# Altium PCB EDR_New.PcbDoc
Units mm, origin at the board's own origin, x right, y up, seen from the top; angles counter-clockwise.
Board outline 66.29 x 44.2 mm, 2 copper layers (Top Layer, Bottom Layer); 27 components, 22 nets, 104 pads, 40 vias.
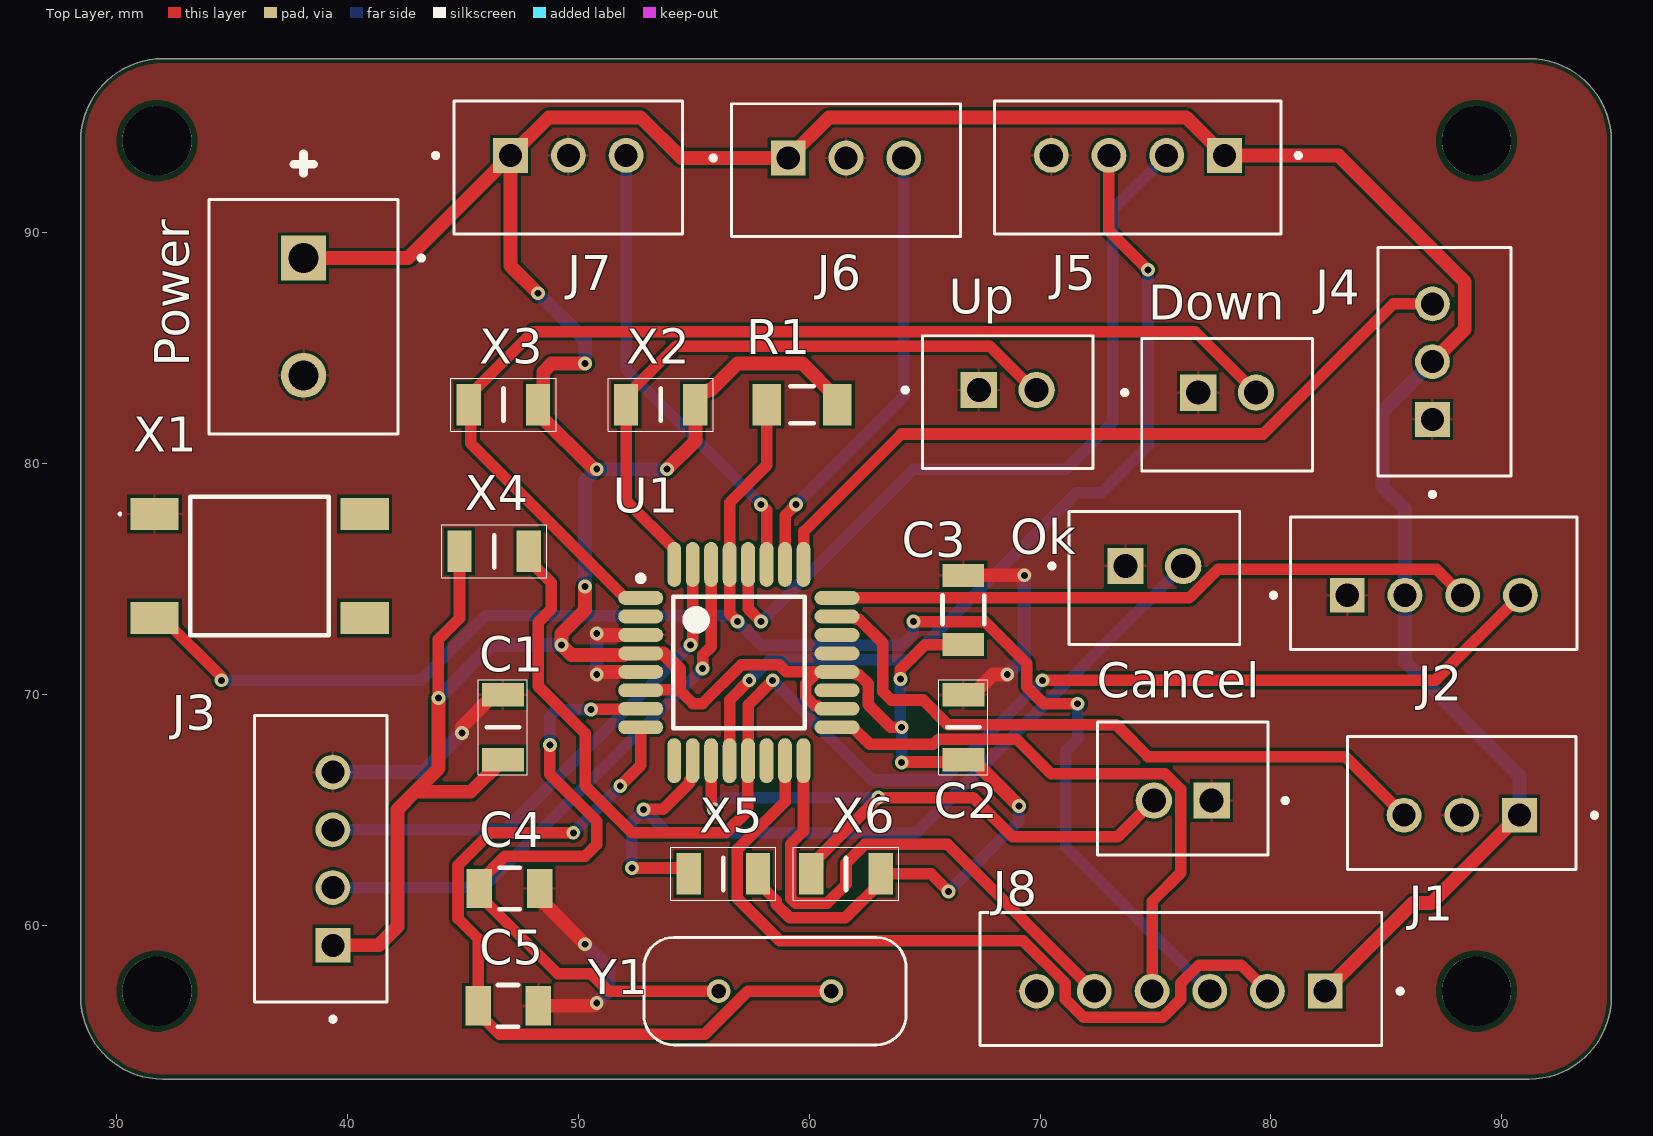
[diagram p0: Top Layer view]
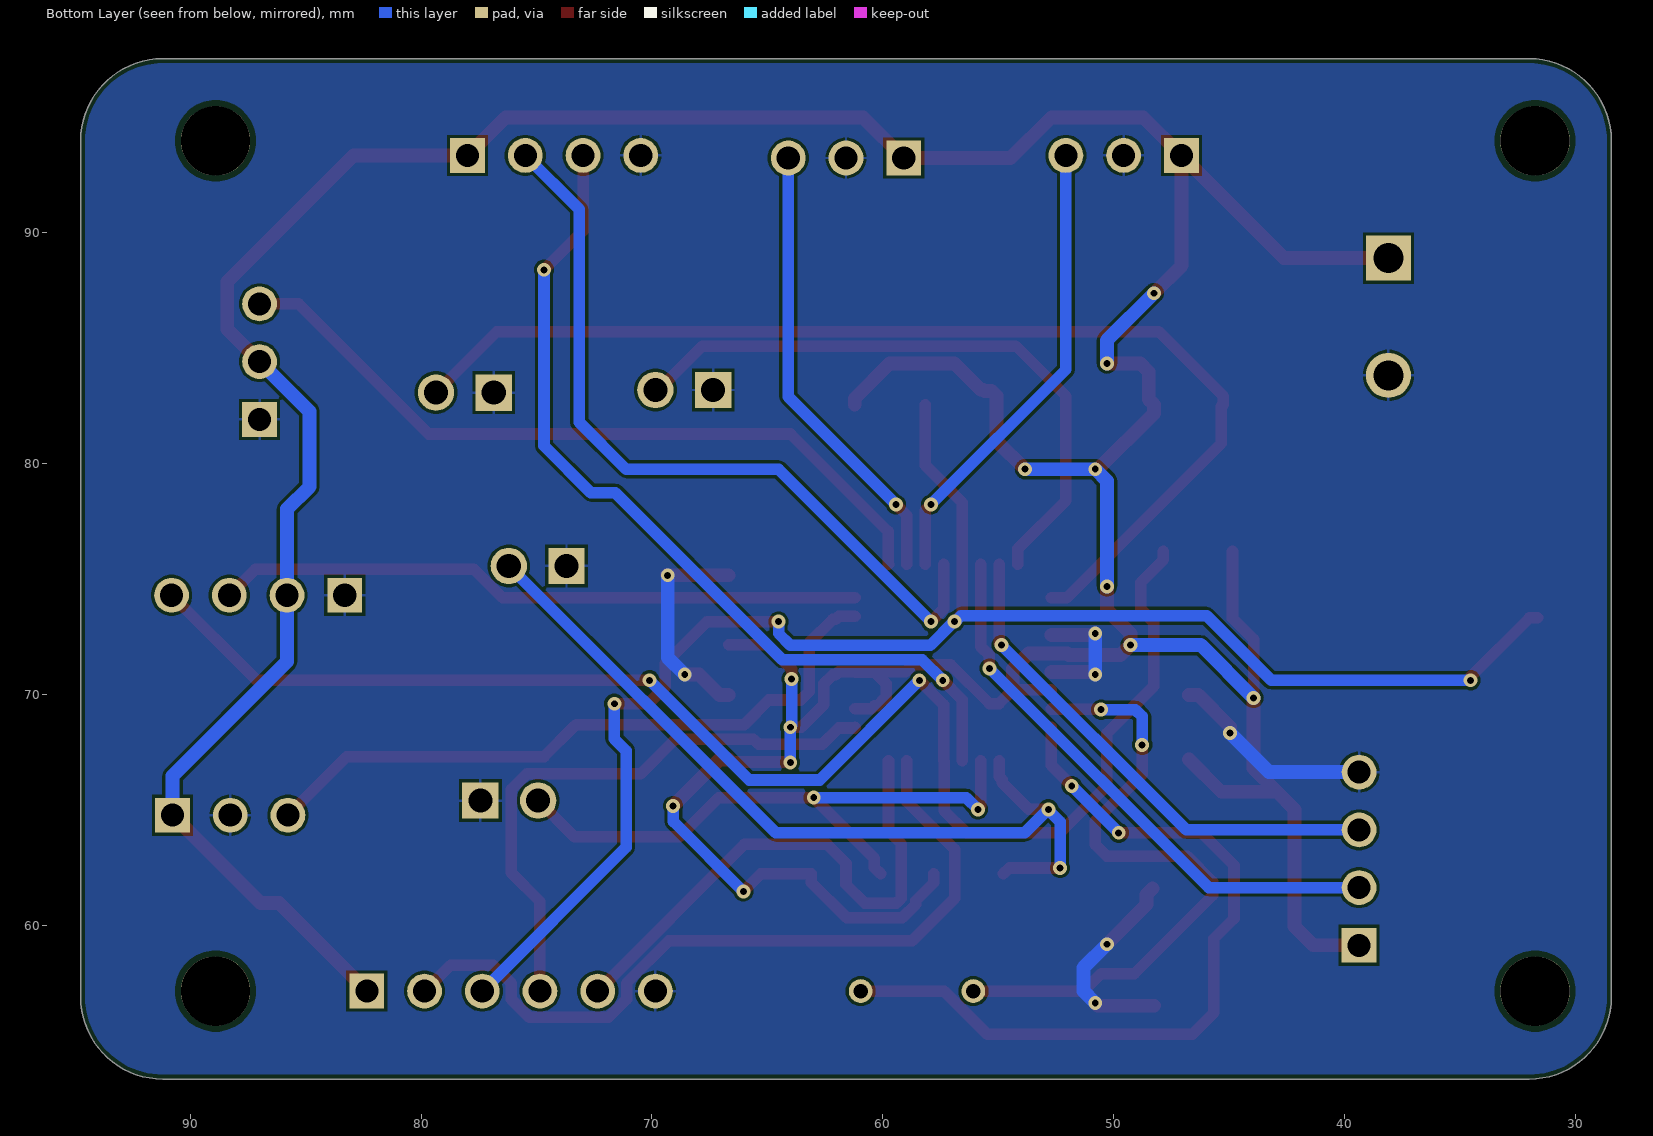
[diagram p1: Bottom Layer view, seen from below]
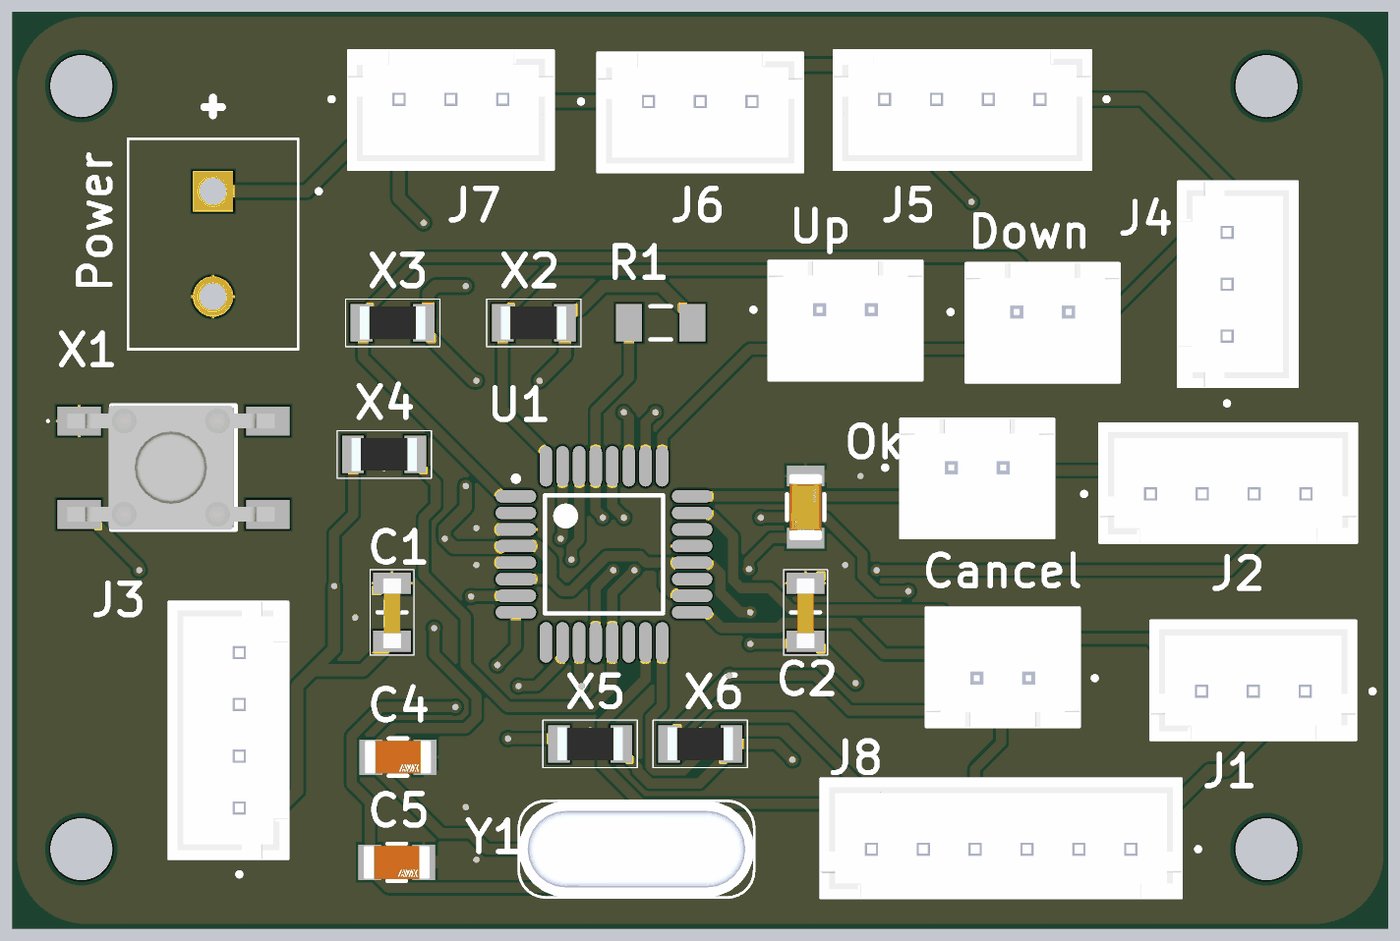
[diagram p2: 3D render of the assembled board from above, using the file's embedded part models]

## Layer stack, top to bottom
Top Solder: solder mask 0.0102, Solder Resist, Dk 3.5
Top Layer: signal copper 0.0356
Dielectric 1: dielectric 0.32, FR-4, Dk 4.8
Bottom Layer: signal copper 0.0356
Bottom Solder: solder mask 0.0102, Solder Resist, Dk 3.5

## Board outline
28.448,56.896 28.448,93.98 cw(c32.004,93.98) 32.004,97.536 91.186,97.536 cw(c91.186,93.98) 94.742,93.98 94.742,56.896 cw(c91.186,56.896) 91.186,53.34 32.004,53.34 cw(c32.004,56.896)

## Design rules (kind name [scope] priority, off if disabled: settings)
BoardOutlineClearance [All] p1: gap=0.2 ignorepadtopadclearanceinfootprint=FALSE
Clearance [All] p1: gap=0.127 ignorepadtopadclearanceinfootprint=FALSE except(0.25: Arc-Hole Track-Hole SMDPad-Hole THPad-Hole Via-Hole Fill-Hole Poly-Hole Region-Hole Text-Hole)
ComponentClearance [All] p1: gap=0.127 collisioncheckmode=3 verticalgap=0.127 showdistances=TRUE
DiffPairsRouting [All] p1: maxlimit=0.254 minlimit=0.127 mostfreqgap=0.127 toplayer_minwidth=0.127 toplayer_maxwidth=25.4 toplayer_prefwidth=0.127 bottomlayer_minwidth=0.127 bottomlayer_maxwidth=25.4 bottomlayer_prefwidth=0.127 maxuncoupledlength=12.7
Height [All] p1: minheight=0 maxheight=1816.048 prefheight=12.7
HoleSize [All] p1: absolutevalues=TRUE maxlimit=6.3 minlimit=0.3 maxpercent=80.000 minpercent=20.000
HoleToHoleClearance [All] p1: gap=0.25 allowstackedmicrovias=FALSE
MinimumAnnularRing [All] p1: minimumring=0.076
MinimumSolderMaskSliver [All] p1: minsoldermaskwidth=0
PlaneClearance [All] p1: clearance=0.127
PlaneConnect PlaneConnectPowerPads [InPadClass('PowerPads')] p1: planeconnectstyle=Direct reliefexpansion=0.508 reliefentries=4 reliefconductorwidth=0.254 reliefairgap=0.254
PlaneConnect [All] p2: pad.planeconnectstyle=Relief pad.reliefexpansion=0.3 pad.reliefentries=4 pad.reliefconductorwidth=0.127 pad.reliefairgap=0.127 via.planeconnectstyle=Direct via.reliefexpansion=0.3 via.reliefentries=4 via.reliefconductorwidth=0.127 via.reliefairgap=0.127
PolygonConnect PolygonConnectPowerPads [All vs (InPadClass('PowerPads'))] p1: connectstyle=Direct reliefconductorwidth=0.254 reliefentries=4 polygonreliefangle="90 Angle" airgapwidth=0.254
PolygonConnect [All] p2: thpad.connectstyle=Relief thpad.reliefconductorwidth=0.127 thpad.reliefentries=4 thpad.polygonreliefangle="90 Angle" thpad.airgapwidth=0.127 smdpad.connectstyle=Relief smdpad.reliefconductorwidth=0.127 smdpad.reliefentries=4 smdpad.polygonreliefangle="90 Angle" smdpad.airgapwidth=0.127 via.connectstyle=Direct via.reliefconductorwidth=0.127 via.reliefentries=4 via.polygonreliefangle="90 Angle" via.airgapwidth=0.127
RoutingVias [All] p1: holewidth=0.3 width=0.6 viastyle="Through Hole" minholewidth=0.3 minwidth=0.6 maxholewidth=0.6 maxwidth=6.6
SilkToSilkClearance [All] p1: silktosilkclearance=0
SilkToSolderMaskClearance [IsPad] p1: minsilkscreentomaskgap=0.127 clearancetoexposedcopper=TRUE
SolderMaskExpansion [All] p1: expansion=0.075 istentingtop=FALSE
Width [All] p1: maxlimit=25.4 minlimit=0.127 preferedwidth=0.127 minimp=50.000000 maximp=50.000000 favimp=50.000000
20 further rules are at their usual default settings.

## Classes and differential pairs
component class MCU: C1 C2 C3 C4 C5 J8 R1 U1 X1 Y1
component class Main0: Cancel Down J3 J4 J5 J6 Ok Power Up X2 X3 X4 X5 X6

## Components (designator, comment, footprint, x,y, rotation, side; value= is the part's Value field where it differs from the comment)
C1 "C1206C106K8RAC" CAPC3216X180N 46.736,68.58 r270 top
C2 "C1206C106K8RAC" CAPC3216X180N 66.675,68.58 r270 top
C3 "CC1206KRX7R9BB104" FP-CC1206-1_25-MFG 66.675,73.66 r90 top value="100 nF"
C4 "12065A220JAT2A" FP-1206-L_3_2_0_2-W_1_6_0-IPC_C 47.021,61.595 r0 top
C5 "12065A220JAT2A" FP-1206-L_3_2_0_2-W_1_6_0-IPC_C 46.959,56.515 r0 top
Cancel "B2B-XH-A(LF)(SN)" JST_B2B-XH-A(LF)(SN) 76.18,65.93 r0 top
Down "B2B-XH-A(LF)(SN)" JST_B2B-XH-A(LF)(SN) 78.105,82.55 r180 top
J1 "PH_Sensor" "JST_B3B-XH-A (LF)(SN)" 88.265,65.295 r0 top
J2 "Turbidity_Sensor" JST_B4B-XH-A(LF)(SN) 87.055,74.82 r0 top
J3 "Display" JST_B4B-XH-A(LF)(SN) 38.845,62.885 r90 top
J4 "Conductivity_Sensor" "JST_B3B-XH-A (LF)(SN)" 87.52,84.415 r270 top
J5 "Temperature_Sensor" JST_B4B-XH-A(LF)(SN) 74.235,92.82 r180 top
J6 "MQ9" "JST_B3B-XH-A (LF)(SN)" 61.595,92.71 r180 top
J7 "MQ135" "JST_B3B-XH-A (LF)(SN)" 49.57,92.82 r180 top
J8 "B6B-XH-A(LF)(SN)" JST_B6B-XH-A(LF)(SN) 76.1,57.675 r0 top
Ok "B2B-XH-A(LF)(SN)" JST_B2B-XH-A(LF)(SN) 74.95,75.04 r180 top
Power "TB006-508-02BE" terminalbox 38.1,88.9 r270 top
R1 "RC1206FR-0710KL" RESC3116X65X40ML10T20 59.69,82.55 r0 top
U1 "ATmega328P-AU" 32A_M 56.955,71.38 r0 top
Up "B2B-XH-A(LF)(SN)" JST_B2B-XH-A(LF)(SN) 68.6,82.66 r180 top
X1 "TS04-66-65-BK-160-SMT" TS046665BK160SMT 36.195,75.565 r0 top
X2 "RCC1206220RFKEA" RESC3216X60N 53.57,82.55 r180 top
X3 "RCC1206220RFKEA" RESC3216X60N 46.76,82.55 r180 top
X4 "RCC1206220RFKEA" RESC3216X60N 46.355,76.2 r180 top
X5 "RCC1206220RFKEA" RESC3216X60N 56.285,62.23 r180 top
X6 "RCC1206220RFKEA" RESC3216X60N 61.595,62.23 r180 top
Y1 "ECS-160-20-4_1" Oscillator 58.52,57.15 r180 top value=16MHz

## Footprints (in the part's own frame and the unit in brackets; to place one, negate y for a bottom-side part, rotate by r counter-clockwise, add the part's x,y. Pads: shape width x height; smd on the part's side, far side on the other; paste and mask are expansions set on the pad)
32A_M [mm] "Thin QFP, 32-Leads, Body 7x7mm, Pitch 0.8mm, IPC Low Density"
  oval 1.95x0.6 smd: 1(-4.25,2.8) 2(-4.25,2) 3(-4.25,1.2) 4(-4.25,0.4) 5(-4.25,-0.4) 6(-4.25,-1.2) 7(-4.25,-2) 8(-4.25,-2.8) 17(4.25,-2.8) 18(4.25,-2) 19(4.25,-1.2) 20(4.25,-0.4) 21(4.25,0.4) 22(4.25,1.2) 23(4.25,2) 24(4.25,2.8)
  oval 0.6x1.95 smd: 9(-2.8,-4.25) 10(-2,-4.25) 11(-1.2,-4.25) 12(-0.4,-4.25) 13(0.4,-4.25) 14(1.2,-4.25) 15(2,-4.25) 16(2.8,-4.25) 25(2.8,4.25) 26(2,4.25) 27(1.2,4.25) 28(0.4,4.25) 29(-0.4,4.25) 30(-1.2,4.25) 31(-2,4.25) 32(-2.8,4.25)
  silkscreen extent -4.37,-2.85 2.85,3.77, body extent -3.5,-3.5 3.5,3.5, height 1.2
CAPC3216X180N [mm]
  rect 1.02x1.82 smd: 1(-1.4,0) 2(1.4,0)
  silkscreen extent -2.06,-1.06 2.06,1.06, body extent -1.65,-0.44 1.75,0.44
FP-1206-L_3_2_0_2-W_1_6_0-IPC_C [mm]
  rect 1.105x1.706 smd paste+0 mask+0: 1(-1.301,0) 2(1.301,0)
  silkscreen extent -0.45,-0.9 0.45,0.9, body extent -1.95,-1 1.95,1, height 0.25
FP-CC1206-1_25-MFG [mm]
  rect 1x1.8 smd paste+0 mask+0: 1(-1.5,0) 2(1.5,0)
  silkscreen extent -0.62,-0.9 0.62,0.9, body extent -2.2,-1.25 2.2,1.25, height 0.25
JST_B2B-XH-A(LF)(SN) [mm]
  rect 1.575x1.575 / inner round 1.575 / far side rect 1.575x1.575 hole 1.05: 1(1.25,-0.525)
  round 1.575 hole 1.05: 2(-1.25,-0.525)
  silkscreen extent -3.7,-2.88 4.54,2.87, body extent -3.7,-2.88 3.7,2.88, height 7
"JST_B3B-XH-A (LF)(SN)" [mm]
  rect 1.508x1.508 / inner round 1.508 / far side rect 1.508x1.508 hole 1: 1(2.5,-0.525)
  round 1.508 hole 1: 2(0,-0.525) 3(-2.5,-0.525)
  silkscreen extent -4.95,-2.88 5.85,2.87, body extent -4.95,-2.88 4.95,2.88, height 7
JST_B4B-XH-A(LF)(SN) [mm]
  rect 1.508x1.508 / inner round 1.508 / far side rect 1.508x1.508 hole 1: 1(-3.75,-0.525)
  round 1.508 hole 1: 2(-1.25,-0.525) 3(1.25,-0.525) 4(3.75,-0.525)
  silkscreen extent -7.05,-2.88 6.2,2.87, body extent -6.2,-2.88 6.2,2.88, height 7
JST_B6B-XH-A(LF)(SN) [mm]
  rect 1.508x1.508 / inner round 1.508 / far side rect 1.508x1.508 hole 1: 1(6.25,-0.525)
  round 1.508 hole 1: 2(3.75,-0.525) 3(1.25,-0.525) 4(-1.25,-0.525) 5(-3.75,-0.525) 6(-6.25,-0.525)
  silkscreen extent -8.7,-2.88 9.6,2.87, body extent -8.7,-2.88 8.7,2.88, height 7
Oscillator [mm]
  round 1.03 hole 0.63: 1(-2.44,0) 2(2.44,0)
  silkscreen extent -5.68,-2.33 5.68,2.33, body extent -5.68,-2.32 5.68,2.32, height 3.51
RESC3116X65X40ML10T20 [mm] "Chip Resistor, 2-Leads, Body 3.10x1.60mm, IPC Low Density"
  rect 1.25x1.8 smd: 1(-1.525,0) 2(1.525,0)
  silkscreen extent -0.5,-0.8 0.5,0.8, body extent -1.6,-0.85 1.6,0.85, height 0.65
RESC3216X60N [mm]
  rect 1.05x1.8 smd: 1(-1.5,0) 2(1.5,0)
  silkscreen extent -2.27,-1.15 2.28,1.15, body extent -1.58,-0.8 1.58,0.8, height 0.6
terminalbox [mm]
  rect 1.95x1.95 / inner round 1.95 / far side rect 1.95x1.95 hole 1.3: 1(0,0)
  round 1.95 hole 1.3: 2(5.08,0)
  silkscreen extent -2.54,-4.1 7.62,5.2
TS046665BK160SMT [mm]
  rect 2.1x1.4 smd: 1(-4.55,2.25) 2(-4.55,-2.25) 3(4.55,2.25) 4(4.55,-2.25)
  silkscreen extent -6.1,-3 3,3, body extent -5.13,-3 4.87,3, height 6.61

## Part data
C1 C2: "Multilayer Ceramic Capacitors MLCC - SMD/SMT 10V 10uF X7R 1206 0.1", Capacitance=10uF, Manufacturer_Name=KEMET, Mouser Part Number=80-C1206C106K8RAC, Datasheet Link=https://www.mouser.in/datasheet/2/212/KEM_C1002_X7R_SMD-1102033.pdf, Geometry.Height=1.8mm, Manufacturer_Part_Number=C1206C106K8RAC, Mouser Price/Stock=https://www.mouser.co.uk/ProductDetail/KEMET/C1206C106K8RAC?qs=IIhARexJuViDIgySPNv42g%3D%3D
C3: library part CMP-03422-000842-1, "CAP CER 0.1UF 50V X7R 1206", Capacitance="100 nF", Manufacturer=Yageo, Package=CC1206-1.25, Temperature="-55°C to +125°C", Temperature Characteristic=X7R, Temperature Coefficient=15%, Temperature Range High=+125°C, Temperature Range Low=-55°C, Tolerance=0.1, Voltage Rating="50 V", Automotive=No, Automotive Grade=NA, Category=Cap, ComponentLink2Description=Datasheet, ComponentLink2URL=http://www.yageo.com/documents/recent/UPY-NP0X7R_HV_1KV-to-3KV_11.pdf, Device Class L1="Passive Components", Device Class L2=Capacitors, Device Class L3="Ceramic Capacitors", Digikey Description="CAP CER 0.1UF 50V X7R 1206", Footprint Url=http://www.yageo.com/exep/pages/download/literatures/UPY-C_GEN_24.pdf, Height=1.45mm, Lead Free=Yes, Manufacturer Part Number=CC1206KRX7R9BB104, Material=Ceramic, Mouser Description="Multilayer Ceramic Capacitors MLCC - SMD/SMT 100nF 50V X7R 10%", Octopart=https://octopart.com/cc1206krx7r9bb104-yageo-39467816, RoHS=TRUE
C4 C5: library part CMP-1037-00977-2, "General Purpose Ceramic Capacitor, 1206, 22pF, 5%, NP0, 30ppm/°C, 50V", Capacitance=22pF, Case Code (Imperial)=1206, Case Code (Metric)=3216, Dielectric=C0G, Max Operating Temperature=125°C, Min Operating Temperature=-55°C, Package Quantity=1, Tolerance=5%, Voltage=50V, Case/Package=1206, Construction=Flat, Contact Plating=Tin, Depth=1.6mm, Lead Free="Lead Free", Length=3.2mm, Mount="Surface Mount", Number of Pins=2, Packaging="Tape and Reel", Radiation Hardening=No, REACH SVHC="No SVHC", RoHS Compliant=Yes, Series=-, Termination=SMD/SMT, Thickness=0.037inch, Voltage Rating=50V, Voltage Rating (DC)=50V, Width=0.063inch
Cancel Down Ok Up: "Connector Header Through Hole 2 position 0.098 (2.50mm)", Package=None, Check_prices=https://www.snapeda.com/parts/B2B-XH-A(LF)(SN)/JST+Sales+America+Inc./view-part/?ref=eda, MF="JST Sales America Inc.", MP=B2B-XH-A(LF)(SN), SnapEDA_Link=https://www.snapeda.com/parts/B2B-XH-A(LF)(SN)/JST+Sales+America+Inc./view-part/?ref=snap
J1 J4 J6 J7: library part B3B-XH-A_(LF)(SN), "Connector Header Through Hole 3 position 0.098 (2.50mm)", Package=None, Check_prices=https://www.snapeda.com/parts/B3B-XH-A%20(LF)(SN)/JST+Sales+America+Inc./view-part/?ref=eda, MF="JST Sales America Inc.", MP="B3B-XH-A (LF)(SN)", SnapEDA_Link=https://www.snapeda.com/parts/B3B-XH-A%20(LF)(SN)/JST+Sales+America+Inc./view-part/?ref=snap
J2 J3 J5: library part B4B-XH-A(LF)(SN)_1, "Connector Header Through Hole 4 position 0.098 (2.50mm)", Package=None, Availability="In Stock", Check_prices=https://www.snapeda.com/parts/B4B-XH-A(LF)(SN)/JST+Sales+America+Inc./view-part/?ref=eda, MF="JST Sales", MP=B4B-XH-A(LF)(SN), Price=None, Purchase-URL=https://pricing.snapeda.com/search/part/B4B-XH-A(LF)(SN)/?ref=eda, SnapEDA_Link=https://www.snapeda.com/parts/B4B-XH-A(LF)(SN)/JST+Sales+America+Inc./view-part/?ref=snap
J8: "Connector Header Through Hole 6 position 0.098 (2.50mm)", Package=None, Check_prices=https://www.snapeda.com/parts/B6B-XH-A(LF)(SN)/JST+Sales+America+Inc./view-part/?ref=eda, MF="JST Sales", MP=B6B-XH-A(LF)(SN), SnapEDA_Link=https://www.snapeda.com/parts/B6B-XH-A(LF)(SN)/JST+Sales+America+Inc./view-part/?ref=snap
Power: "Barrier Strip Terminal Block", Manufacturer="CUI Devices", Supplier Part Number=490-TB006-508-02BE, Manufacturer Part Number=TB006-508-02BE, Pricing="1=0.86, 10=0.315, 50=0.315, 100=0.301, 1000=0.21, 10000=0.175 (USD)", RoHS=Yes, Stock=47338, Supplier=Mouser
R1: library part CMP-1014-00623-2, "Chip Resistor, 10 KOhm, +/- 1%, 0.25 W, -55 to 155 degC, 1206 (3216 Metric), RoHS, Tape and Reel", Case Code (Imperial)=1206, Case Code (Metric)=3216, Manufacturer=Yageo, Max Operating Temperature=155degC, Min Operating Temperature=-55degC, Package Description="2-Pin Surface Mount Device, Body 3.1 x 1.6 mm", Package Quantity=5000, Package Reference=1206.0, Power Rating=250mW, Resistance=10KΩ, Temperature Coefficient=100ppm/degreesC, Tolerance=1%, Voltage Rating=200V, Case/Package=1206, Composition=ThickFilm, Datasheet URL=http://www.yageo.com/NewPortal/yageodocoutput?fileName=/pdf/R-Chip/PYu-RC_Group_51_RoHS_L_5.pdf, Datasheet Version="Rev. 5, 10/2016", Depth=1.6mm, Height=0.55mm, Lead Free=LeadFree, Length=3.1mm, Manufacturer URL=http://www.yageo.com/, Military Standard=Not, Packaging=TapeandReel, REACH SVHC=Unknown, RoHSCompliant=true, Termination=SMD/SMT, Width=1.6mm
U1: library part CMP-0095-00269-2, "8-bit AVR Microcontroller, 32KB Flash, 1KB EEPROM, 2KB SRAM, 32-pin TQFP, Industrial Grade (-40°C to 85°C)", Code_JEDEC=MS-026-ABA, ComponentLink1Description="Manufacturer URL", ComponentLink1URL=http://www.atmel.com/, ComponentLink2Description="ATmega48A/48PA/88A/88PA/168A/168PA/328/328P Datasheet", ComponentLink2URL=http://www.atmel.com/dyn/resources/prod_documents/doc8271.pdf, ComponentLink3Description="ATmega48A/48PA/88A/88PA/168A/168PA/328/328P Summary", ComponentLink3URL=http://www.atmel.com/dyn/resources/prod_documents/8271S.pdf, DatasheetVersion="revD, May-2011", PackageDescription="32-Lead, 7x7x1.0 mm Body, 0.8mm Lead Pitch, Thin Profile Plastic Quad Flat Package (TQFP)", PackageReference=32A, PackageVersion="revC, Oct-2010", RevisionNote="DatasheetVersion & PackageVersion updated. URLs added."
X1: "Tactile Switches 6 x 6 mm, 6.5 mm Act Height, 160 gf, Black, Surface Mount, SPST,", Manufacturer_Name="CUI Devices", Mouser Part Number=179-TS046665BK160SMT, Datasheet Link=https://www.cuidevices.com/product/resource/ts04.pdf, Geometry.Height=6.7mm, Manufacturer_Part_Number=TS04-66-65-BK-160-SMT, Mouser Price/Stock=https://www.mouser.co.uk/ProductDetail/CUI-Devices/TS04-66-65-BK-160-SMT?qs=A6eO%252BMLsxmTgRLoTHWtDYQ%3D%3D
X2 X3 X5 X6: "Thick Film Resistors - SMD 220ohms 1% 100ppm", Manufacturer_Name=Vishay, Mouser Part Number=71-RCC1206220RFKEA, Resistance=220Ω, Datasheet Link=https://4donline.ihs.com/images/VipMasterIC/IC/VISH/VISH-S-A0011718072/VISH-S-A0011718072-1.pdf?hkey=6D3A4C79FDBF58556ACFDE234799DDF0, Geometry.Height=0.6mm, Manufacturer_Part_Number=RCC1206220RFKEA, Mouser Price/Stock=https://www.mouser.co.uk/ProductDetail/Vishay-Dale/RCC1206220RFKEA?qs=IS%252B4QmGtzzrRn9QnSak10Q%3D%3D
X4: "Thick Film Resistors - SMD 220ohms 1% 100ppm", Manufacturer_Name=Vishay, Mouser Part Number=71-RCC1206220RFKEA, Resistance=4.7k, Datasheet Link=https://4donline.ihs.com/images/VipMasterIC/IC/VISH/VISH-S-A0011718072/VISH-S-A0011718072-1.pdf?hkey=6D3A4C79FDBF58556ACFDE234799DDF0, Geometry.Height=0.6mm, Manufacturer_Part_Number=RCC1206220RFKEA, Mouser Price/Stock=https://www.mouser.co.uk/ProductDetail/Vishay-Dale/RCC1206220RFKEA?qs=IS%252B4QmGtzzrRn9QnSak10Q%3D%3D
Y1: Package=None, Availability=Unavailable, MP=ECS-160-20-4, Price=None

## Free pads (board coordinates)
  round 3 hole 3 unplated: 6(31.75,57.15) 6(31.75,93.98) 6(88.9,57.15) 6(88.9,93.98)

## Via types
v1: diameter 0.6, hole 0.3, Top Layer to Bottom Layer, tented both sides, 40 vias

## Nets (pads, with @x,y where several pads share a name; then routed paths per layer and width w, separated by ;. In a path a pad name is that pad's centre, name@x,y a point inside that pad or via, vN(x,y) a via of type N, cw(c..) or ccw(c..) an arc to the next point about the centre after c; other vN are vias at no path point)
5V: C1.2 C2.2 C3.1 J1.1 J2.2 J3.1 J4.2 J5.1 J6.1 J7.1 J8.1 Power.1 R1.2 U1.4 U1.6 U1.18 U1.20 X2.1 X3.1 X4.2 X5.1 X6.1 | length 220.3
  Top Layer w0.5: v1(43.942,69.85) 43.942,72.39 44.855,73.303 X4.2 ; U1.6 52.724,70.199 54.371,70.199 54.557,70.014 54.966,69.604 55.38,69.604 57.065,71.289 58.7,71.289 59.009,70.98 U1.20 ; X5.1 57.785,61.855 58.566,61.074 58.566,60.914 59.154,60.326 61.566,60.326 63.095,61.855 X6.1 65.278,62.23 v1(66.04,61.468) ; U1.18 60.503,69.38 60.38,69.503 60.25,69.503 59.853,69.9 59.853,70.46 60.353,70.961 61.186,70.961 U1.20 ; v1(63.95,70.67) 63.95,71.085 65.025,72.16 C3.1 ; v1(64.008,67.056) 64.027,67.075 66.57,67.075 C2.2 ; v1(64.008,68.58) 63.527,68.58 62.557,69.55 62.557,70.46 62.16,70.857 62.03,70.857 61.907,70.98 U1.20
  Top Layer w0.6: Power.1 42.625,88.9 J7.1 ; J3.1 41.355,59.135 42.164,59.944 42.164,65.024 42.926,65.786 ; v1(43.942,69.85) 43.942,66.802 42.926,65.786 ; C1.2 45.342,65.786 42.926,65.786 ; v1(48.26,87.376) 47.07,88.566 J7.1 ; v1(50.292,74.676) 50.292,73.66 49.276,72.644 v1(49.276,72.136) 49.705,71.707 51.957,71.707 52.03,71.78 53.696,71.78 54.371,71.105 54.371,70.199 ; v1(50.292,84.328) 48.836,84.328 48.485,83.977 48.485,82.775 X3.1 48.26,82.175 50.679,79.756 v1(50.8,79.756) ; v1(53.848,79.756) 55.07,80.978 X2.1 55.07,82.925 55.295,83.15 55.596,83.15 55.646,83.2 55.768,83.2 56.896,84.328 59.712,84.328 61.215,82.825 R1.2 ; C2.2 67.075,67.18 v1(69.088,65.167) ; J8.1 86.16,60.96 86.955,60.96 J1.1 ; J4.2 88.392,85.812 88.392,87.884 82.931,93.345 J5.1 76.334,94.996 60.856,94.996 J6.1 54.467,93.235 52.706,94.996 48.721,94.996 J7.1
  Bottom Layer w0.5: v1(63.95,70.67) 63.95,68.665 64.008,68.607 v1(64.008,68.58) v1(64.008,67.056) ; v1(66.04,61.468) 69.069,64.497 69.069,65.148 v1(69.088,65.167)
  Bottom Layer w0.6: v1(43.942,69.85) 46.228,72.136 v1(49.276,72.136) ; v1(48.26,87.376) 50.292,85.344 v1(50.292,84.328) ; v1(50.292,74.676) 50.292,79.248 v1(50.8,79.756) v1(53.848,79.756) ; J4.2 84.836,82.256 84.836,78.994 85.805,78.025 J2.2 85.805,71.421 90.765,66.461 J1.1
CANCEL: Cancel.2 U1.11 X6.2 | length 27.3
  Top Layer w0.5: U1.11 55.755,65.176 55.88,65.051 v1(55.88,65.024) ; X6.2 60.37,62.505 60.37,62.91 v1(62.992,65.532) 67.115,65.532 68.808,63.839 73.364,63.839 Cancel.2
  Bottom Layer w0.5: v1(55.88,65.024) 56.388,65.532 v1(62.992,65.532)
Conductivity: J4.3 U1.25 | length 32.7
  Top Layer w0.5: U1.25 59.774,75.649 59.774,77.059 63.995,81.28 79.665,81.28 85.3,86.915 J4.3
DHT_11_A: J5.2 U1.28 | length 34
  Top Layer w0.5: U1.28 57.355,73.709 v1(57.912,73.152)
  Bottom Layer w0.5: v1(57.912,73.152) 64.516,79.756 71.12,79.756 73.152,81.788 73.152,91.012 J5.2
DHT_11_D: J5.3 U1.12 | length 38.6
  Top Layer w0.5: U1.12 56.555,69.763 v1(57.404,70.612) ; J5.3 72.985,90.083 v1(74.676,88.392)
  Bottom Layer w0.5: v1(57.404,70.612) 58.301,71.509 64.354,71.509 71.585,78.74 72.644,78.74 74.676,80.772 v1(74.676,88.392)
DOWN: Down.2 U1.1 X3.2 | length 48.6
  Top Layer w0.5: U1.1 52.03,74.18 45.337,80.873 45.337,82.473 X3.2 45.26,82.925 48.052,85.717 76.713,85.717 Down.2
GND: C1.1 C2.1 C3.2 C4.2 C5.2 Cancel.1 Down.1 J1.2 J2.1 J3.4 J4.1 J5.4 J6.2 J7.2 J8.6 Ok.1 Power.2 U1.3 U1.5 U1.21 Up.1 X1.1 | length 33.1
  Top Layer w0.6: v1(44.958,68.326) 44.958,68.602 46.336,69.98 C1.1 ; C5.2 50.673,56.515 v1(50.8,56.642) ; C4.2 48.574,61.343 48.574,60.9 v1(50.292,59.182) ; v1(50.8,70.866) 50.914,70.98 U1.5 ; v1(50.8,72.644) 50.864,72.58 U1.3 ; C2.1 67.075,69.98 67.961,70.866 v1(68.58,70.866) ; C3.2 v1(69.318,75.16) v1@69.342,75.184
  Bottom Layer w0.6: J3.4 43.267,66.635 v1(44.958,68.326) ; v1(50.292,59.182) 51.308,58.166 51.308,57.15 v1(50.8,56.642) ; v1(50.8,70.866) v1(50.8,72.644) ; v1(68.58,70.866) 69.318,71.604 v1(69.318,75.16)
MISO: J8.5 U1.16 | length 23.7
  Top Layer w0.5: U1.16 59.755,64.082 59.193,63.52 59.193,61.174 59.414,60.953 60.776,60.953 61.595,61.772 61.595,62.688 62.414,63.507 65.993,63.507 J8.5
MOSI: J8.2 U1.15 | length 34.1
  Top Layer w0.5: U1.15 58.955,65.358 56.883,63.286 56.883,61.174 58.72,59.337 69.263,59.337 71.1,57.499 71.1,56.801 71.882,56.019 75.318,56.019 76.1,56.801 76.1,57.499 76.882,58.281 78.719,58.281 J8.2
MQ_9: J6.3 U1.26 | length 19.7
  Top Layer w0.5: U1.26 58.955,77.751 v1(59.436,78.232)
  Bottom Layer w0.5: v1(59.436,78.232) 64.095,82.891 J6.3
MQ_135: J7.3 U1.27 | length 20.2
  Top Layer w0.5: v1(57.912,78.232) 58.155,77.989 U1.27
  Bottom Layer w0.5: J7.3 52.07,84.074 v1(57.912,78.232)
NetC4_1: C4.1 U1.7 Y1.2 | length 28.9
  Top Layer w0.5: v1(48.768,67.818) 48.768,66.548 50.8,64.516 50.8,63.5 50.292,62.992 46.816,62.992 45.72,61.896 C4.1 45.72,61.294 49.102,57.912 50.546,57.912 51.308,57.15 Y1.2 ; v1(50.546,69.342) 50.565,69.361 52.686,69.361 U1.7
  Bottom Layer w0.5: v1(48.768,67.818) 48.768,69.049 49.061,69.342 v1(50.546,69.342)
NetC5_1: C5.1 U1.8 Y1.1 | length 34.6
  Top Layer w0.5: v1(49.784,64.008) 46.194,64.008 44.791,62.604 44.791,60.295 45.658,59.427 C5.1 45.658,56.214 46.588,55.285 55.476,55.285 57.341,57.15 Y1.1 ; v1(51.816,66.04) 52.705,66.929 U1.8
  Bottom Layer w0.5: v1(49.784,64.008) v1(51.816,66.04)
OK: Ok.2 U1.10 X5.2 | length 37.3
  Top Layer w0.5: v1(52.324,62.484) 54.531,62.484 X5.2 ; v1(52.832,65.024) 53.681,65.024 54.832,66.175 54.832,66.305 54.955,66.428 U1.10
  Bottom Layer w0.5: v1(52.324,62.484) 52.324,64.489 v1@52.832,64.997 ; v1@52.851,65.005 53.848,64.008 64.643,64.008 Ok.2
PH: J1.3 U1.23 | length 29.4
  Top Layer w0.5: U1.23 61.907,73.38 62.03,73.257 62.16,73.257 63.184,72.233 63.184,70.127 63.551,69.76 64.942,69.76 66.008,68.694 73.288,68.694 73.402,68.58 74.672,67.31 83.225,67.31 J1.3
RESET: J8.3 R1.1 U1.29 X1.2 | length 71.1
  Top Layer w0.5: X1.2 31.995,73.315 34.525,70.785 34.525,70.631 v1(34.544,70.612) ; v1(56.896,73.152) 56.555,73.493 U1.29 56.555,78.311 58.165,79.921 R1.1 ; v1(64.516,73.152) 67.616,73.152 69.427,71.341 69.427,70.332 70.163,69.596 v1(71.628,69.596)
  Bottom Layer w0.5: v1(34.544,70.612) 43.18,70.612 45.974,73.406 56.615,73.406 56.869,73.152 56.923,73.152 57.939,72.136 64.008,72.136 64.516,72.644 v1(64.516,73.152) ; v1(71.628,69.596) 71.628,68.072 71.12,67.564 71.12,63.38 J8.3
RX: J3.2 U1.30 | length 24.6
  Top Layer w0.5: v1(55.378,71.126) 55.397,71.145 55.397,71.712 55.755,72.07 U1.30
  Bottom Layer w0.5: J3.2 45.887,61.635 v1(55.378,71.126)
SCK: J8.4 U1.17 | length 25.4
  Top Layer w0.5: U1.17 61.238,68.547 61.913,68.547 62.622,67.838 65.379,67.838 65.609,68.067 68.98,68.067 70.477,66.57 75.412,66.57 76.095,65.887 76.095,62.277 74.85,61.033 J8.4
Turbidity: J2.3 U1.24 | length 28.1
  Top Layer w0.5: U1.24 76.462,74.18 77.708,75.426 87.174,75.426 J2.3
Turbidity_D: J2.4 U1.13 X4.1 | length 63.5
  Top Layer w0.5: X4.1 47.855,75.825 48.837,74.843 48.837,73.708 48.26,73.131 48.26,70.358 50.292,68.326 50.292,66.04 52.324,64.008 56.388,64.008 57.336,64.956 57.336,67.111 U1.13 57.355,69.547 v1(58.42,70.612) ; v1(70.104,70.612) 87.122,70.612 J2.4
  Bottom Layer w0.5: v1(58.42,70.612) 62.738,66.294 65.786,66.294 v1(70.104,70.612)
TX: J3.3 U1.31 | length 22.3
  Top Layer w0.5: v1(54.864,72.136) 54.955,72.227 U1.31
  Bottom Layer w0.5: J3.3 46.863,64.135 v1(54.864,72.136)
UP: U1.32 Up.2 X2.2 | length 27.6
  Top Layer w0.5: U1.32 54.155,76.305 52.07,78.39 X2.2 52.07,82.925 54.235,85.09 67.821,85.09 69.726,83.185 Up.2
pads on no net: U1.2 U1.9 U1.14 U1.19 U1.22 X1.3 X1.4

## Polygon pours and split planes (outlines as drawn)
GND on Top Layer "GND_L01_P000" (solid, pour order 0): 28.448,56.896 28.448,93.98 cw(c32.004,93.98) 32.004,97.536 91.186,97.536 cw(c91.186,93.98) 94.742,93.98 94.742,56.896 cw(c91.186,56.896) 91.186,53.34 32.004,53.34 cw(c32.004,56.896)
GND on Bottom Layer "GND_L02_P001" (solid, pour order 1): 28.448,56.896 28.448,93.98 cw(c32.004,93.98) 32.004,97.536 91.186,97.536 cw(c91.186,93.98) 94.742,93.98 94.742,56.896 cw(c91.186,56.896) 91.186,53.34 32.004,53.34 cw(c32.004,56.896)

## Silkscreen, mask and mechanical layers (free items; w line width, h text height)
Top Overlay:
  lines w0.381: 37.682,92.964 38.532,92.964 ; 38.1,92.571 38.1,93.421
Mechanical 1:
  the board outline again, w0.5